# Altium PCB 400861.PcbDoc (part 6 of 7)
Units mm, origin at the board's own origin, x right, y up, seen from the top; angles counter-clockwise.
Board outline 145 x 63.5 mm, 8 copper layers (Top Side, Mid-Layer 1, Mid-Layer 2, Mid-Layer 3, Mid-Layer 4, Mid-Layer 5, Mid-Layer 6, Bottom Side), stack 1.529 mm thick; 287 components, 241 nets, 1164 pads, 3527 vias.
Unrouted connection lines stored in the file: 1.
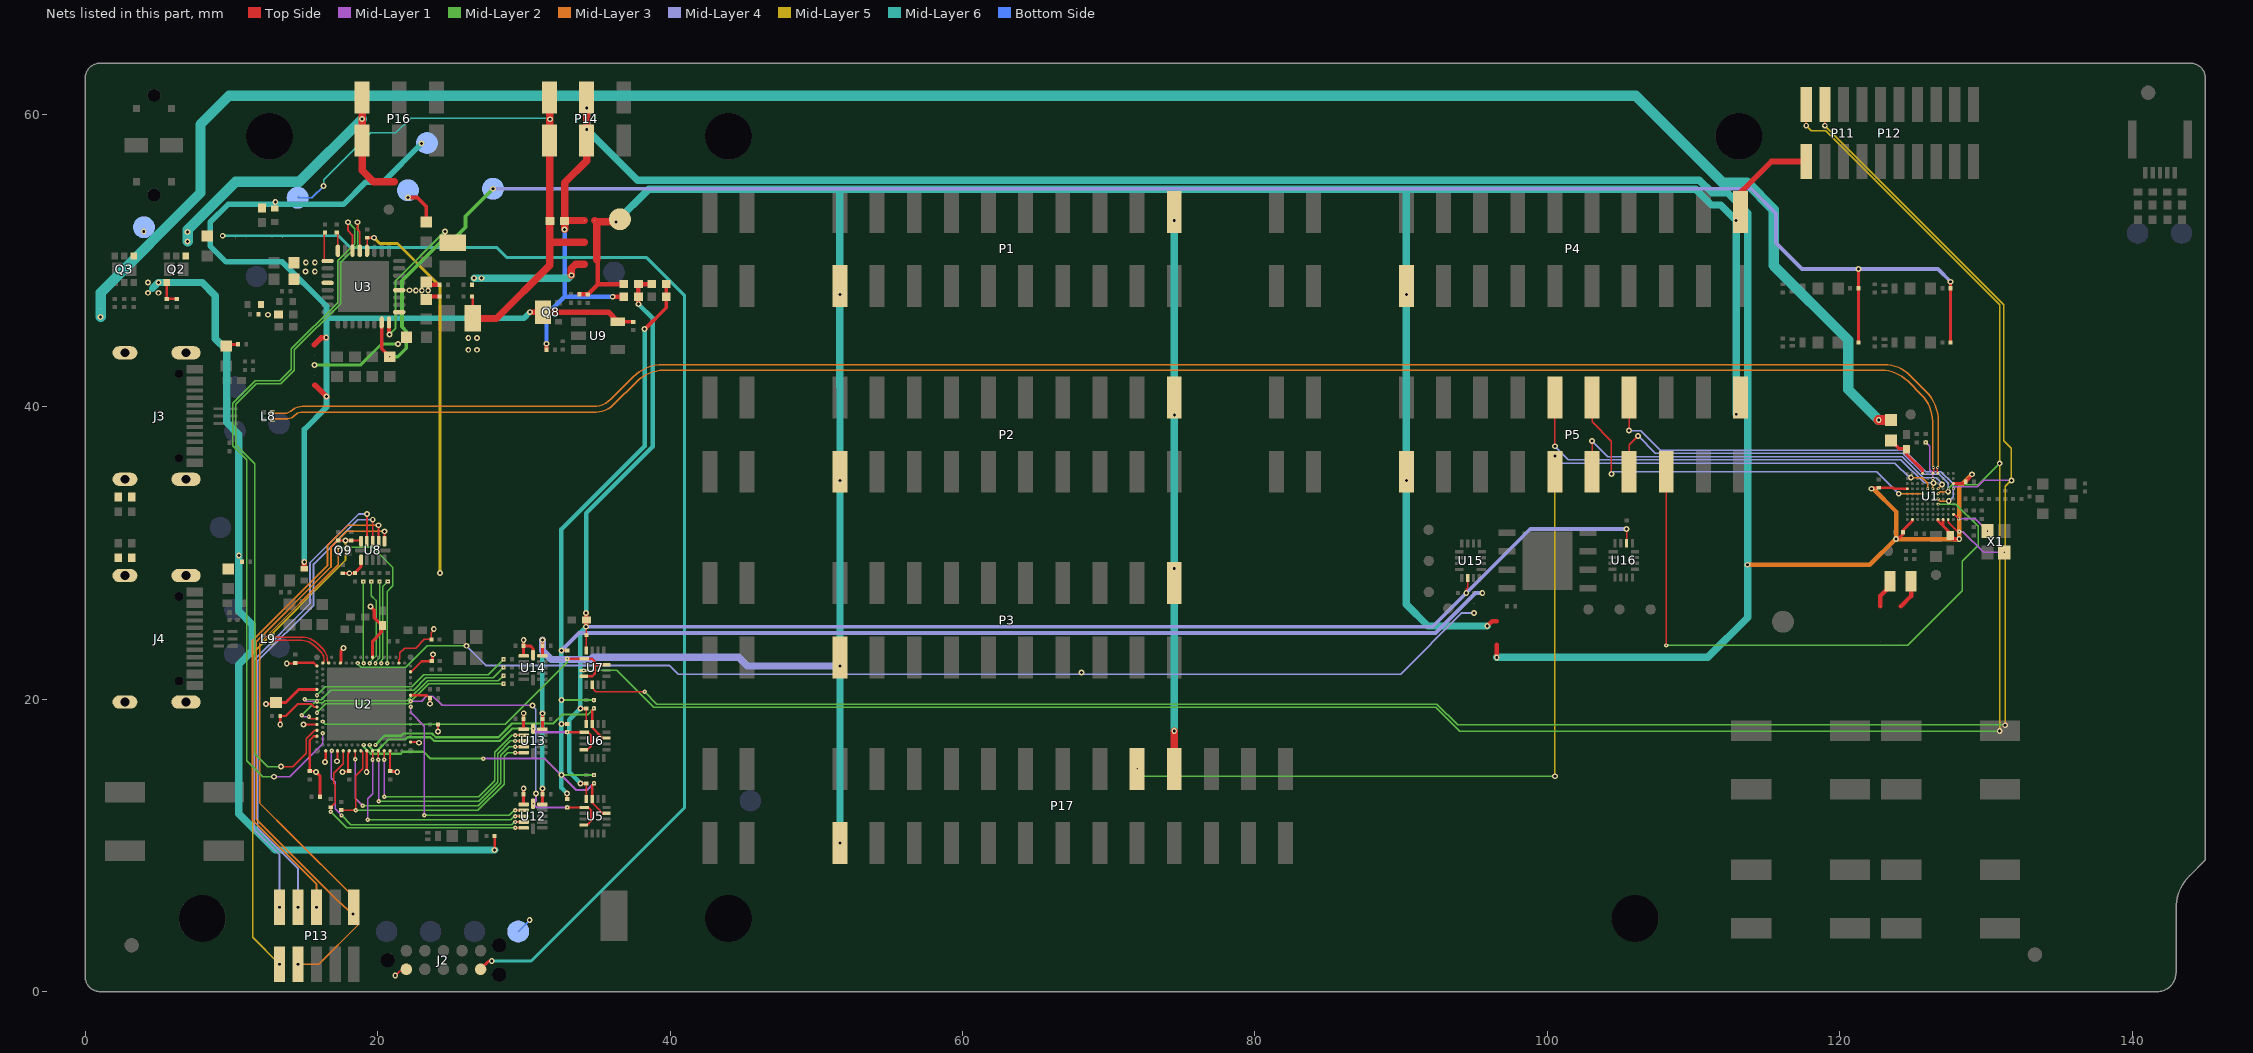
[diagram p11: the nets of this part, all layers, seen from the top]

## Via types
v1: diameter 0.4, hole 0.2, Top Side to Bottom Side, tented both sides, 2409 vias
v2: diameter 0.3, hole 0.1, Top Side to Mid-Layer 1, tented both sides, 307 vias
v3: diameter 0.3, hole 0.1, Mid-Layer 1 to Mid-Layer 2, tented both sides, 204 vias
v4: diameter 0.4, hole 0.2, Mid-Layer 3 to Mid-Layer 4, tented both sides, 199 vias
v5: diameter 0.3, hole 0.1, Mid-Layer 2 to Mid-Layer 3, tented both sides, 98 vias
v6: diameter 0.3, hole 0.1, Mid-Layer 4 to Mid-Layer 5, tented both sides, 82 vias
v7: diameter 0.3, hole 0.1, Mid-Layer 2 to Mid-Layer 3, 70 vias
v8: diameter 0.2, hole 0.1, Top Side to Mid-Layer 1, tented both sides, 64 vias
v9: diameter 0.2, hole 0.1, Mid-Layer 1 to Mid-Layer 2, tented both sides, 41 vias
v10: diameter 0.2, hole 0.1, Mid-Layer 2 to Mid-Layer 3, 17 vias
v11: diameter 0.2, hole 0.1, Mid-Layer 2 to Mid-Layer 3, tented both sides, 14 vias
v12: diameter 0.3, hole 0.1, Mid-Layer 5 to Mid-Layer 6, tented both sides, 12 vias
v13: diameter 0.2, hole 0.1, Mid-Layer 1 to Mid-Layer 2, 4 vias
v14: diameter 0.3, hole 0.1, Top Side to Mid-Layer 1, tented top, 3 vias
v15: diameter 0.2, hole 0.1, Top Side to Mid-Layer 1, tented top, 2 vias
v16: diameter 0.225, hole 0.1, Mid-Layer 1 to Mid-Layer 2, tented both sides, 1 vias

## Nets (pads, with @x,y where several pads share a name; then routed paths per layer and width w, separated by ;. In a path a pad name is that pad's centre, name@x,y a point inside that pad or via, vN(x,y) a via of type N, cw(c..) or ccw(c..) an arc to the next point about the centre after c; other vN are vias at no path point) (continued)
P3.06: P5.9 P17.18 U1.G6 | length 77.4
  Top Side w0.1: P17.18@71.94,15.24 v2(71.94,15.242)
  Mid-Layer 2 w0.1: v2(71.94,15.242) 72.445,14.737 100.511,14.737 v5(100.515,14.733)
  Mid-Layer 3 w0.1: v4(124.858,35.157) 124.874,35.141 125.658,35.141 126.02,34.779 v8(126.02,34.4)
  Mid-Layer 4 w0.1: v4(100.515,36.645) 101.002,36.158 123.774,36.158 124.776,35.157 v4(124.858,35.157)
  Mid-Layer 5 w0.1: v5(100.515,14.733) v4(100.515,36.645)
  other v2: 100.515,36.645
  other v3: 71.94,15.242 100.515,36.645
  other v4: 100.515,14.733
  other v5: 100.515,36.645
  other v6: 100.515,14.733 100.515,36.645
  other v9: 126.02,34.4
  other v11: 126.02,34.4
P3.07: P5.10 U1.G5 | length 30.1
  Top Side w0.1: v1(100.513,37.306) 100.515,37.308 P5.10@100.515,40.05
  Mid-Layer 3 w0.1: v11(126.37,34.4) 126.37,34.749 v4(126.419,34.797)
  Mid-Layer 4 w0.1: v1(100.513,37.306) 101.44,36.38 124.18,36.38 125.762,34.797 v4(126.419,34.797)
  other v8: 126.37,34.4
  other v9: 126.37,34.4
P3.08: P5.11 U1.G4 | length 28.3
  Top Side w0.1: P5.11@103.055,34.97 v1@103.055,37.659
  Mid-Layer 3 w0.1: v8(126.72,34.4) 126.988,34.668 v4(126.988,34.691)
  Mid-Layer 4 w0.1: v1(103.055,37.659) 104.134,36.58 124.283,36.58 125.706,35.157 126.597,35.157 126.988,34.765 v4(126.988,34.691)
  other v9: 126.72,34.4
  other v11: 126.72,34.4
P3.09: P5.12 U1.F7 | length 27.2
  Top Side w0.1: P5.12@103.055,40.05 103.055,38.97 104.379,37.647 v1(104.379,35.397)
  Mid-Layer 3 w0.1: v4(124.034,34.058) 124.042,34.05 v11(125.67,34.05)
  Mid-Layer 4 w0.1: v1(104.379,35.397) 104.532,35.55 122.542,35.55 v4(124.034,34.058)
  other v8: 125.67,34.05
  other v9: 125.67,34.05
P3.10: P5.13 U1.F4 | length 27.2
  Top Side w0.1: P5.13@105.595,34.97 105.595,37.401 v1(106.211,38.017)
  Mid-Layer 3 w0.1: v11(126.72,34.05) 126.867,34.197 v4(127.417,34.197)
  Mid-Layer 4 w0.1: v1(106.211,38.017) 107.394,36.834 124.323,36.834 125.784,35.373 126.818,35.373 127.417,34.773 v4(127.417,34.197)
  other v8: 126.72,34.05
  other v9: 126.72,34.05
P3.11: P5.14 U1.E4 | length 27.5
  Top Side w0.1: v1(105.595,38.374) P5.14@105.595,40.05
  Mid-Layer 3 w0.1: v9(126.72,33.7) 126.871,33.55 v4(127.455,33.55)
  Mid-Layer 4 w0.1: v1(105.595,38.374) 106.388,38.374 107.724,37.039 124.417,37.039 125.878,35.577 126.916,35.577 127.767,34.725 127.767,33.862 v4(127.455,33.55)
  other v8: 126.72,33.7
  other v11: 126.72,33.7
P3.12: P5.15 U1.D4 | length 41.3
  Top Side w0.1: v2(108.135,23.68) P5.15@108.135,34.97
  Mid-Layer 2 w0.1: v2(108.135,23.68) 124.634,23.68 128.39,27.436 128.39,29.447 129.475,30.533 129.475,31.817 127.942,33.35 v9(126.72,33.35)
  other v3: 108.135,23.68
  other v8: 126.72,33.35
P5V0: C38.2 C59.1 FB5.2 Q8.3 R16.2 SB28.1 SB29.1 TP4.1 U9.5 | length 70.3
  Top Side w0.254: U9.5@36.433,45.816 C59.1@37.477,45.816
  Top Side w0.381: FB5.2@14.982,28.924 v1(14.982,29.393) ; SB28.1@15.67,44.25 16.155,44.736 v1(16.483,44.736) ; 15.71,41.49 v1(16.5,40.7) ; v1(30.415,46.473) 35.776,46.473 U9.5@36.433,45.816
  Mid-Layer 6 w0.381: v1(14.982,29.393) 14.982,38.457 16.5,39.974 16.5,44.719 v1(16.483,44.736) 16.5,44.752 16.5,46.034 ; v1(23,58) 20.361,55.361 19.168,55.361 17.655,53.848 13.152,53.848 v1(13,54) 12.848,53.848 9.77,53.848 8.546,52.624 8.546,51 9.634,49.912 13.475,49.912 16.5,46.887 16.5,46.035 ; v1(30.415,46.473) 29.989,46.047 16.513,46.047 16.5,46.035
P5V0:LED: C52.2 R25.2 R26.2 R27.2 R28.2 TP1.1 U3.31 | length 130.7
  Top Side w0.203: R27.2@121.285,44.4 R25.2@121.285,48.1 121.285,49.367 cw(c121.366,49.367) v1@121.309,49.424 ; R28.2@127.585,44.4 R26.2@127.585,48.1 v1(127.585,48.555)
  Top Side w0.254: U3.31@20.275,45.775 20.275,43.977 v2(20.825,43.427)
  Mid-Layer 2 w0.254: v2(20.825,43.427) 21.374,43.427 21.961,44.013 21.961,45.178 21.658,45.481 21.658,48.62 24.557,51.519 25.25,51.519 26.014,52.283 26.014,53.04 v1(27.889,54.915)
  Mid-Layer 4 w0.254: v1(27.889,54.915) 113.941,54.915 115.632,53.224 115.632,51.214 117.422,49.424 v1(121.285,49.424) 126.716,49.424 v1(127.585,48.555)
  other v3: 20.825,43.427
QSPI_CTRL: SB5.1 U2.B14 | length 79.7
  Mid-Layer 2 w0.1: v3(18.65,22.478) 18.65,22.408 18.883,22.175 21.912,22.175 23.393,23.657 v5(26.07,23.657)
  Mid-Layer 4 w0.127: v5(26.07,23.657) 27.429,22.298 39.963,22.298 40.55,21.711 68.132,21.711 89.967,21.711 94.158,25.903 v4(94.981,25.903)
  other v1: 68.132,21.831
  other v2: 18.65,22.478 94.981,25.903
  other v3: 94.981,25.903
  other v4: 26.07,23.657
  other v5: 94.981,25.903
Shield: C67.1 C68.1 C73.1 C74.1 J3.SHLD J4.SHLD
SWD0_CLK: R12.1 U2.B18 | length 5.9
  Top Side w0.106: R12.1@19.567,28.049 v3(19.567,28.052)
  Mid-Layer 2 w0.106: v3(19.45,22.475) 19.45,22.518 19.89,22.958 19.89,26.762 19.567,27.084 v3(19.567,28.052)
  other v2: 19.45,22.475 19.567,28.052
SWD0_CLK_EXT: P13.6 U8.8 | length 33.8
  Top Side w0.125: U8.8@20.064,30.816 v1(20.064,31.901)
  Mid-Layer 3 w0.125: v1(15.827,5.775) 15.827,7.354 11.431,11.75 11.431,24.002 16.564,29.135 16.564,30.496 17.97,31.901 v1(20.064,31.901)
SWD0_IO: R6.1 U2.B16 | length 5.6
  Top Side w0.106: R6.1@19.007,28.048 v3(19.007,28.05)
  Mid-Layer 2 w0.106: v3@19.007,28.053 19.007,22.519 v3(19.05,22.475)
  other v2: 19.05,22.475 19.007,28.05
SWD0_IO_EXT: P13.10 U8.7 | length 36.1
  Top Side w0.125: v1(18.3,5.3) P13.10@18.367,6.595 ; U8.7@20.464,30.816 20.464,31.473 v1(20.477,31.486)
  Mid-Layer 3 w0.125: 11.696,11.804 11.696,23.942 16.801,29.048 16.801,30.395 17.893,31.486 v1(20.477,31.486) ; 11.696,11.804 17.269,6.232 ; 17.269,6.231 ccw(c17.357,6.32) 17.273,6.228 v1(18.3,5.3)
SWD0_RESET: R47.1 U2.B22 | length 5.8
  Top Side w0.106: R47.1@20.689,28.051 v2(20.689,28.053)
  Mid-Layer 2 w0.106: v3(20.25,22.475) 20.25,22.65 20.338,22.739 20.338,27.703 v2(20.689,28.053)
  other v2: 20.25,22.475
  other v3: 20.689,28.053
SWD0_RESET_EXT: P13.2 U8.10 | length 33.8
  Top Side w0.125: v1(13.287,5.775) P13.2@13.287,6.595 ; U8.10@19.264,30.816 v1(19.264,32.67)
  Mid-Layer 4 w0.125: v1(13.287,5.775) 13.287,9.353 11.553,11.086 11.553,22.711 15.374,26.531 15.374,29.338 18.706,32.67 v1(19.264,32.67)
SWD0_SEL: P13.3 Q9.1 U2.B24 | length 47.1
  Mid-Layer 2 w0.106: v3(17.31,30.401) 19.654,30.401 21.036,29.019 21.036,27.759 20.65,27.373 v3(20.65,22.475)
  Mid-Layer 3 w0.106: v1(14.557,1.875) 15.975,1.875 18.663,4.564 18.663,6.167 18.037,6.793 ; v3(17.31,30.401) 17.31,29.205 15.802,27.698 13.529,25.425 11.922,23.818 11.922,12.909 14.233,10.598 18.036,6.795
  other v2: 20.65,22.475 17.31,30.401
  other v5: 17.31,30.401
SWD0_SWO: R13.1 U2.B20 | length 5.7
  Top Side w0.106: v2(20.128,28.051) R13.1@20.128,28.053
  Mid-Layer 2 w0.106: v3(19.85,22.475) 19.85,22.552 20.128,22.83 v3@20.128,28.053 ; v2(20.128,28.051) v3@20.136,28.043
  other v2: 19.85,22.475
  other v3: 20.128,28.051
SWD0_SWO_EXT: P13.4 U8.9 | length 33.8
  Top Side w0.125: v1(14.557,5.775) P13.4@14.557,6.595 ; U8.9@19.664,30.816 v1(19.664,32.283)
  Mid-Layer 4 w0.125: v1(14.557,5.775) 14.557,8.411 11.8,11.168 11.8,22.623 15.615,26.437 15.615,29.245 18.652,32.283 v1(19.664,32.283)
SWD3_CLK: R49.1 U2.R1 | length 15.4
  Mid-Layer 1 w0.1: v3(15,20) 15.125,19.875 v2(15.85,19.875)
  Mid-Layer 2 w0.1: v3(15,20) 15.026,19.974 16.132,19.974 16.788,20.63 22.462,20.63 23.3,21.469 27.903,21.469 v3(28.608,22.174)
  other v2: 28.608,22.174
SWD3_CTRL: R40.2 U2.AB2 U7.1 U7.4 U7.11 | length 23.2
  Top Side w0.152: v3(32.956,22.767) 34.657,22.767 34.843,22.582 34.843,21.725 34.685,21.567 U7.4@34.095,21.567 ; 34.873,22.367 U7.11@35.645,22.367
  Mid-Layer 2 w0.1: v2(16.25,18.475) 16.425,18.3 28.738,18.3 32.956,22.519 v3(32.956,22.767)
  other v2: 32.956,22.767
  other v3: 16.25,18.475
SWD3_IO: R48.1 U2.N1 | length 13.8
  Mid-Layer 2 w0.1: v2(15.85,20.275) 16.419,20.844 22.335,20.844 23.166,21.675 27.551,21.675 v3(28.608,22.731)
  other v2: 28.608,22.731
  other v3: 15.85,20.275
SWD3_RESET: R50.1 U2.AA1 | length 16.1
  Top Side w0.1: v2(15.3,18.8) 15.425,18.675 U2.AA1@15.85,18.675
  Mid-Layer 1 w0.1: v3(14.8,18.9) 14.9,18.8 v2(15.3,18.8)
  Mid-Layer 2 w0.1: v3@14.819,18.881 v3(14.8,18.9) 15.658,19.759 16.238,19.759 16.365,19.886 22.026,19.886 23.41,21.269 28.26,21.269 v3(28.608,21.617)
  other v2: 28.608,21.617
SWD3_SWO: R57.1 U2.W1 | length 13.6
  Top Side w0.1: R57.1@28.608,21.06 v2(28.608,21.062)
  Mid-Layer 2 w0.1: v3(15.85,19.075) 16.456,19.681 22.107,19.681 23.488,21.062 v2(28.608,21.062)
  other v2: 15.85,19.075
  other v3: 28.608,21.062
SWDCLK: P11.4 P12.4 U1.G1 U7.6 | length 150
  Top Side w0.1: U7.6@34.67,20.992 34.67,20.772 34.93,20.512 v2(38.257,20.512) ; v1(118.977,59.228) P11.4@118.977,60.676
  Mid-Layer 1 w0.1: v15(127.77,34.4) 127.892,34.522 129.395,34.522 129.847,34.974 v1(131.736,34.974)
  Mid-Layer 2 w0.1: v2(38.257,20.512) 39.104,19.665 92.453,19.665 93.868,18.249 v5@131.315,18.249
  Mid-Layer 5 w0.1: v1(118.977,59.228) 131.232,46.973 131.232,37.687 131.735,37.184 v1(131.736,34.974) v1(131.736,34.974) 131.315,34.552 v5(131.315,18.224)
  other v3: 38.257,20.512
  other v4: 131.315,18.224
  other v6: 131.315,18.224
SWDIO: P11.2 P12.2 U1.G2 U7.3 | length 151.7
  Top Side w0.1: v1(117.707,59.228) P12.2@117.707,60.676
  Mid-Layer 2 w0.1: v3(34.095,21.967) 36.368,21.967 38.886,19.45 92.379,19.45 94.005,17.824 v5(130.938,17.824) ; v8(127.42,34.4) 127.696,34.675 129.474,34.675 v1(130.938,36.139)
  Mid-Layer 5 w0.1: v1(117.707,59.228) 118.06,58.875 119.029,58.875 130.938,46.967 v1(130.938,36.139) v5(130.938,17.824)
  other v2: 34.095,21.967
  other v4: 130.938,17.824
  other v6: 130.938,17.824
  other v13: 127.42,34.4
TRXTUNE: R2.2 U1.J5 | length 2.7
  Mid-Layer 1 w0.1: v2(125.874,37.566) 126.138,37.302 126.138,35.699 126.37,35.467 v8(126.37,35.1)
TWI0_SCL: U2.AF2 U3.14 | length 51.3
  Top Side w0.125: v1(17.975,52.625) 17.975,52.044 18.275,51.744 U3.14@18.275,50.675
  Mid-Layer 1 w0.1: v1(12.9,14.7) 14,14.7 16.25,16.95 v2(16.25,17.675)
  Mid-Layer 2 w0.1: v1(12.9,14.7) 12.128,14.7 11.04,15.788 11.04,36.382 10.085,37.336 10.085,40.248 11.61,41.773 13.3,41.773 14.102,42.575 14.102,43.977 17.255,47.13 17.255,49.979 18.423,51.147 18.423,52.177 v1(17.975,52.625)
TWI0_SDA: U2.AE1 U3.13 | length 49.6
  Top Side w0.1: v1(13.4,15.4) 14.2,15.4 15.111,16.311 15.111,17.289 15.697,17.875 U2.AE1@15.85,17.875
  Top Side w0.125: v1(18.625,52.625) 18.625,52.139 18.775,51.989 U3.13@18.775,50.675
  Mid-Layer 2 w0.1: v1(13.4,15.4) 12.486,15.4 11.6,16.287 11.6,36.107 10.29,37.417 10.29,40.169 11.693,41.572 13.386,41.572 14.304,42.49 14.304,43.892 17.459,47.047 17.459,49.891 18.625,51.057 v1(18.625,52.625)
UART0_CTRL: R36.2 U2.R31 U5.1 U5.4 U12.12 | length 21.1
  Top Side w0.152: v2(32.956,12.606) 34.393,12.606 34.612,12.386 34.612,11.688 34.331,11.406 U5.4@34.095,11.406
  Mid-Layer 1 w0.1: v2(22.25,19.875) 22.998,19.875 23.332,20.21 23.771,20.21 24.405,19.576 v1(30.582,19.576)
  Mid-Layer 1 w0.152: v1(30.827,13.552) 30.827,13.054 v2(30.629,12.856) 30.879,12.606 v2(32.956,12.606)
  Mid-Layer 4 w0.1: v1(30.582,19.576) 30.827,19.331 v1(30.827,13.552)
UART0_CTS_DBGR: R9.1 U2.AL9 U12.5 | length 18.3
  Top Side w0.1: v2(16.8,12.3) R9.1@16.8,12.615 17.113,12.928 17.113,14.13 17,14.243 17,14.938 17.65,15.588 U2.AL9@17.65,16.475 ; v2(29.397,11.206) U12.5@29.989,11.206
  Mid-Layer 2 w0.1: v2(16.8,12.3) 17.895,11.206 v2(29.397,11.206)
  other v3: 29.397,11.206 16.8,12.3
UART0_HWFC: R19.2 U2.AK16 U5.11 U5.15 | length 20
  Top Side w0.152: v2(34.797,14.247) 34.67,14.12 U5.15@34.67,13.181 34.67,12.927 35.391,12.206 U5.11@35.645,12.206
  Mid-Layer 1 w0.152: v3(27.222,15.94) 31.432,15.94 33.579,13.793 34.342,13.793 v2(34.797,14.247)
  Mid-Layer 2 w0.152: v3(19.05,16.875) 19.05,16.741 19.522,16.269 21.584,16.269 21.718,16.404 23.157,16.404 23.621,15.94 v3(27.222,15.94)
  other v2: 19.05,16.875
UART0_RTS_DBGR: U2.AL5 U12.4 | length 17.5
  Top Side w0.1: v2(29.397,11.606) U12.4@29.989,11.606
  Mid-Layer 1 w0.1: v2(16.85,16.475) 16.809,16.434 16.809,14.584 17.085,14.308 17.085,12.497 v3(17.53,12.053)
  Mid-Layer 2 w0.1: v3(17.53,12.053) 18.162,11.421 29.181,11.421 29.366,11.606 v2(29.397,11.606)
  other v3: 29.397,11.606
UART0_RxD_DBGR: U2.AL19 U12.3 | length 15.6
  Top Side w0.1: v2(19.65,15.851) U2.AL19@19.65,16.475 ; v3(29.397,12.006) U12.3@29.989,12.006
  Mid-Layer 1 w0.1: v3(19.311,11.756) 19.311,13.211 19.65,13.55 19.65,15.482 v2(19.65,15.851)
  Mid-Layer 2 w0.1: v3(19.311,11.756) 29.089,11.756 29.338,12.006 v3(29.397,12.006)
  other v2: 29.397,12.006
UART0_TxD_DBGR: U2.U31 U12.2 | length 14.7
  Top Side w0.1: v3(29.397,12.406) U12.2@29.989,12.406
  Mid-Layer 1 w0.1: v2(22.25,19.475) 22.25,19.101 23.189,18.161 v3(23.189,12.067)
  Mid-Layer 2 w0.1: v3(23.189,12.067) 28.998,12.067 29.337,12.406 v3(29.397,12.406)
  other v2: 29.397,12.406
UART1_CTRL: R38.2 U2.AK18 U6.1 U6.4 U13.12 | length 17.7
  Top Side w0.152: v2(32.956,17.747) U6.1@34.145,17.746 34.397,17.746 34.599,17.545 34.599,16.805 34.34,16.546 U6.4@34.095,16.546
  Mid-Layer 1 w0.152: v2(30.629,17.996) 30.879,17.747 v2(32.956,17.747)
  Mid-Layer 2 w0.152: v2(19.45,16.875) 19.45,16.739 19.655,16.534 20.018,16.534 20.725,17.24 21.871,17.24 22.04,17.409 23.611,17.409 23.879,17.142 28.353,17.142 29.208,17.996 v2(30.629,17.996)
  other v3: 19.45,16.875 30.629,17.996
UART1_CTS_DBGR: R10.1 U2.AL15 U13.5 | length 19.6
  Top Side w0.1: R10.1@17.5,12.415 17.5,12.4 v2(18.503,12.4) 18.503,14.776 18.965,15.238 18.965,16.36 U2.AL15@18.85,16.475 ; v3(29.397,16.346) U13.5@29.989,16.346
  Mid-Layer 2 w0.1: v2(18.503,12.4) 26.859,12.4 28.656,14.198 28.656,16.105 28.898,16.346 v3(29.397,16.346)
  other v2: 29.397,16.346
  other v3: 18.503,12.4
UART1_HWFC: R37.2 U2.AK20 U6.11 U6.15 | length 18.8
  Top Side w0.152: v3(34.794,19.375) 34.67,19.25 U6.15@34.67,18.322 34.67,18.062 35.385,17.346 U6.11@35.645,17.346
  Mid-Layer 2 w0.152: v2(19.85,16.875) 20.473,17.498 21.596,17.498 21.761,17.663 23.718,17.663 23.977,17.404 28.259,17.404 29.193,18.338 32.015,18.338 32.627,18.95 34.37,18.95 v3(34.794,19.375)
  other v2: 34.794,19.375
  other v3: 19.85,16.875
UART1_RTS_DBGR: U2.AL13 U13.4 | length 17.8
  Top Side w0.1: U2.AL13@18.45,16.475 18.474,16.451 18.474,16.363 18.475,16.362 v2(18.475,15.9) ; v3(29.397,16.746) U13.4@29.989,16.746
  Mid-Layer 1 w0.1: v2(18.475,15.9) 18.475,13.213 v3(18.975,12.713)
  Mid-Layer 2 w0.1: v3(18.975,12.713) 26.878,12.713 28.433,14.268 28.433,16.188 28.992,16.746 v3(29.397,16.746)
  other v2: 29.397,16.746
UART1_RxD_DBGR: U2.AL21 U13.3 | length 16.2
  Top Side w0.1: v2(20.05,15.851) U2.AL21@20.05,16.475 ; v3(29.397,17.146) U13.3@29.989,17.146
  Mid-Layer 1 w0.1: v2(20.05,15.851) 20.069,15.832 v3(20.069,13.023)
  Mid-Layer 2 w0.1: v3(20.069,13.023) 26.903,13.023 28.219,14.338 28.219,16.284 29.081,17.146 v3(29.397,17.146)
  other v2: 29.397,17.146
UART1_TxD_DBGR: U2.AL23 U13.2 | length 15.6
  Top Side w0.1: v3(29.397,17.546) U13.2@29.989,17.546
  Top Side w0.125: v2(20.45,15.85) U2.AL23@20.45,16.475
  Mid-Layer 1 w0.1: v3(20.45,13.338) v2(20.45,15.85)
  Mid-Layer 2 w0.1: v3(20.45,13.338) 26.918,13.338 27.999,14.419 27.999,16.364 29.182,17.546 v3(29.397,17.546)
  other v2: 29.397,17.546
USB_DBGR_N: L9.4 U2.B4 | length 4.8
  Top Side w0.099: L9.4@12.8,24.384 ccw(c13.131,24.715) 13.131,24.247 14.792,24.247 cw(c14.792,22.686) 15.896,23.79 16.266,23.42 cw(c15.549,22.703) 16.563,22.703 16.563,22.685 ccw(c16.86,22.685) U2.B4@16.65,22.475
USB_DBGR_P: L9.3 U2.B2 | length 4.5
  Top Side w0.099: L9.3@12.8,23.884 cw(c13.131,23.554) 13.131,24.021 14.792,24.021 cw(c14.792,22.686) 15.736,23.63 16.106,23.26 cw(c15.549,22.703) 16.337,22.703 16.337,22.685 cw(c16.04,22.685) U2.B2@16.25,22.475
USB_nRF54_D+: L8.3 U1.K5 | length 120.1
  Top Side w0.099: U1.K5@126.37,35.45 ccw(c126.221,35.6) 126.432,35.6 126.432,35.754 ccw(c126.295,35.754) v11(126.392,35.851)
  Mid-Layer 3 w0.09: v5(12.8,39.12) cw(c12.932,38.989) 12.932,39.175 13.721,39.175 ccw(c13.721,40.034) 14.328,39.427 cw(c14.84,38.915) 14.84,39.639 15.447,39.639 34.934,39.639 ccw(c34.934,41.304) 36.111,40.126 37.741,41.756 cw(c39.537,39.96) 39.537,42.5 122.867,42.5 cw(c122.867,40) 124.634,41.768 125.605,40.797 cw(c123.809,39.001) 126.349,39.001 126.349,35.956 ccw(c126.496,35.956) v11(126.392,35.851)
  other v2: 12.8,39.12
  other v3: 12.8,39.12
  other v8: 126.392,35.851
  other v9: 126.392,35.851
USB_nRF54_D-: L8.4 U1.K4 | length 120.7
  Top Side w0.099: v11(126.699,35.851) ccw(c126.795,35.754) 126.658,35.754 126.658,35.6 ccw(c126.87,35.6) U1.K4@126.72,35.45
  Mid-Layer 3 w0.09: v2(12.8,39.619) ccw(c12.932,39.751) 12.932,39.565 13.721,39.565 ccw(c13.721,40.034) 14.053,39.702 cw(c14.841,38.914) 14.841,40.029 15.608,40.029 34.771,40.029 ccw(c34.771,41.687) 35.943,40.514 37.463,42.034 cw(c39.537,39.96) 39.537,42.893 123.029,42.893 cw(c123.029,40.393) 124.797,42.161 125.883,41.075 cw(c123.809,39.001) 126.742,39.001 126.742,35.956 cw(c126.594,35.956) v11(126.699,35.851)
  other v3: 12.8,39.619
  other v5: 12.8,39.619
  other v8: 126.699,35.851
  other v9: 126.699,35.851
VBUS: C34.2 C35.2 C55.2 J2.5 P16.1 Q2.4 Q3.4 R14.1 SB17.1 SB31.2 TP14.1 | length 110.4
  Top Side w0.2: J2.5@27.04,1.53 27.466,1.957 ; 27.553,2.043 27.466,1.957 ; v1(27.8,2.1) 27.61,2.1 27.466,1.957
  Top Side w0.5: P16.1@18.935,61.161 cw(c18.935,61.096) 19,61.096 18.935,61.031 P16.1@18.935,58.231 18.935,56.161 19.701,55.395 SB31.2@21.151,55.395
  Mid-Layer 6 w0.2: v1(9.4,51.7) 17.33,51.7 18.13,50.9 28.152,50.9 28.851,50.2 38.4,50.2 41,47.6 41,12.6 30.5,2.1 v1(27.8,2.1)
  Mid-Layer 6 w0.7: v1@7.009,51.305 7.009,51.947 7.009,52.119 10.285,55.394 14.643,55.394 v1(18.931,59.682)
  other v1: 12.5,46.3 7.002,51.298 7.002,51.947 4,52
VBUS:DBGR: C69.2 FB4.2 Q2.1 R5.2 R20.1 R21.1 | length 63
  Top Side w0.15: Q2.1@5.57,48.506 R20.1@5.57,47.391 R21.1@6.242,47.391 ; v1(28.003,9.685) R5.2@28.003,10.615
  Mid-Layer 6 w0.5: 4.6,48.1 v1(5,48.5) 8.004,48.5 8.9,47.604 8.9,44.654 9.672,43.882 9.672,38.923 10.502,38.093 v1(10.502,29.827) 10.502,26.037 11.432,25.106 11.432,23.314 10.5,22.381 10.5,12.175 12.989,9.685 v1(28.003,9.685)
  other v1: 4.3,47.8 5,47.8 4.3,48.5
VBUS:nRF: C63.2 FB3.2 R1.2 SB6.2 | length 146.7
  Top Side w0.106: FB3.2@9.635,44.147 FB3.2@9.763,44.275
  Top Side w0.2: FB3.2@9.763,44.275 C63.2@10.44,44.275
  Top Side w0.7: v1(122.666,39.098) R1.2@123.506,39.098
  Mid-Layer 6 w0.7: v1(1.052,46.152) 1.052,47.805 7.876,54.629 7.876,59.313 9.833,61.27 106.042,61.27 111.962,55.35 113.631,55.35 115.492,53.489 115.492,49.662 120.58,44.574 120.58,41.184 v1(122.666,39.098)
VBUS_5V0: C11.2 R1.1 U1.K7 | length 3.4
  Top Side w0.203: C11.2@124.568,37.101 124.568,36.765 125.67,35.663 U1.K7@125.67,35.45
  Top Side w0.254: R1.1@123.506,37.698 124.064,37.141 C11.2@124.528,37.141
VDD:DBGR: C15.1 C16.1 C17.1 C18.1 C21.1 C22.1 C23.1 C24.1 C26.1 C54.1 C77.1 C79.1 C82.1 C85.1 C88.2 J2.1 R7.2 R35.2 R39.2 TP7.1 U2.A19 U2.AC1 U2.AG1 U2.AJ31 U2.AL3 U2.AL7 U2.AL11 U2.AL17 U2.AL25 U2.B8 U2.B28 U2.C1 U2.E31 U2.L1 U2.N31 U2.U1 U3.12 U8.1 U12.1 U13.1 U14.1 U14.12 | length 71.9
  Top Side w0.1: U3.12@19.275,50.675 C54.1@19.275,51.565 ; v1(21.2,1.1) 21.511,1.411 21.841,1.411 J2.1@21.96,1.53 ; U2.B28@21.45,22.475 21.45,22.704 21.513,22.767 21.513,23.177 21.836,23.5 22.6,23.5 23.19,24.091 C24.1@23.668,24.091 23.668,24.548 23.839,24.719 v1(23.839,24.806)
  Top Side w0.15: v1(13.339,18.275) C15.1@13.339,18.854 13.714,18.854 14.536,19.675 15.463,19.675 15.663,19.475 U2.U1@15.85,19.475 ; v1(14.925,18.275) U2.AC1@15.85,18.275 ; C16.1@15.35,15.085 15.35,17.2 15.625,17.475 U2.AG1@15.85,17.475 ; C16.1@15.426,15.085 15.724,15.085 v1(15.774,15.035) ; v1(16.409,15.7) 16.45,15.7 U2.AL3@16.45,16.475 ; v1(17.209,15.763) ccw(c17.1,15.866) 17.25,15.866 U2.AL7@17.25,16.475 ; v1(17.599,15.035) 17.624,15.06 C17.1@18.022,15.06 ; U2.AL11@18.05,16.475 18.026,16.38 cw(c17.65,16.475) 17.984,16.28 ccw(c18.113,16.203) 17.963,16.204 17.963,15.286 ccw(c18.113,15.286) 18.007,15.18 18.042,15.145 C17.1@18.074,15.113 ; v1(19.25,15.025) U2.AL17@19.25,16.475 ; C21.1@20.85,15.035 C21.1@20.85,15.085 U2.AL25@20.85,16.475 ; 21.085,15.085 21.1,15.085 ; U2.AJ31@22.25,17.075 22.588,17.075 cw(c22.588,16.925) 22.621,17.072 v1(22.825,17.025) ; U2.N31@22.25,20.275 23.364,20.275 C22.1@23.573,20.067 23.574,20.066 23.574,19.699 v1(23.57,19.695) ; U2.E31@22.25,21.875 22.292,21.875 23.017,22.6 23.69,22.6 C23.1@23.7,22.61 ; v1(24.135,17.796) R7.2@24.135,18.275
  Top Side w0.152: v1(13.783,22.443) 14.302,22.443 C77.1@14.35,22.49 15.635,22.49 U2.C1@15.85,22.275
  Top Side w0.187: U2.B8@17.45,22.475 17.493,22.518 17.493,23.347 v1(17.653,23.508) ; v1@17.692,23.47 v1@17.73,23.508
  Top Side w0.2: v1(12.372,19.675) 12.75,19.675 C26.1@13.05,19.768 13.689,19.768 14.597,20.675 U2.L1@15.85,20.675 ; v1(15.774,15.035) 16.045,14.765 R35.2@16.045,13.341
  Top Side w0.203: R39.2@17.601,28.619 v1(18.061,28.619) C88.2@18.452,28.62 ; C88.2@18.452,28.62 18.452,28.655 18.864,29.067 U8.1@18.864,29.536 ; C54.1@19.275,51.565 v1(19.754,51.565) ; C21.1@20.85,15.085 20.875,15.06 21.313,15.06 v1(21.338,15.035) ; C23.1@23.7,22.61 23.704,22.61 23.738,22.644 23.738,23.038 v1(23.775,23.075) ; v1(29.987,13.903) C79.1@29.987,13.515 U12.1@29.989,12.806 U12.1@29.989,12.806 ; U13.1@29.989,17.946 C82.1@29.988,18.654 v1(29.988,19.042) ; U14.1@29.989,22.967 C85.1@29.989,23.655 ; v1(29.989,24.043) C85.1@29.989,23.655 ; U14.12@30.629,23.017 30.629,23.465 30.438,23.655 C85.1@29.989,23.655
  Top Side w0.225: v1(19.5,26.35) 19.775,26.075 19.775,25.575 C18.1@20.325,25.025 ; U2.A19@19.65,22.875 19.65,23.97 20.25,24.57 C18.1@20.25,25.025
  Mid-Layer 5 w0.203: v1(19.754,51.565) 20.147,51.173 21.348,51.173 24.271,48.25 24.271,28.645 v1(24.253,28.627)
  Mid-Layer 6 w0.305: v1(29.987,13.903) v1(29.987,13.903)
  Bottom Side w0.1: TP7.1@29.616,4.115 v1(30.398,4.897)
VDD:IO: C80.1 C83.1 C86.1 P1.1 P1.20 P2.1 P2.20 P3.1 P3.20 P4.1 P4.20 P5.1 P5.20 P11.1 P12.1 P17.1 P17.20 R42.1 R52.2 R53.2 SB19.1 SB20.1 SB21.1 SB23.1 TP2.1 U12.11 U13.11 U14.11 | length 263
  Top Side w0.203: U12.11@31.269,12.806 C80.1@31.269,13.511 v1(31.269,13.899) ; U13.11@31.269,17.946 C83.1@31.269,18.651 v1(31.269,19.039) ; U14.11@31.269,22.967 C86.1@31.269,23.655 v1(31.269,24.043)
  Top Side w0.305: R52.2@33.799,47.693 34.352,47.693 R53.2@34.359,47.687 35.066,48.393 ; 34.975,50.05 35.066,49.959 35.066,48.393 ; R42.1@36.835,48.393 35.066,48.393 ; v1(95.889,25.009) 96.218,25.338 SB23.1@96.541,25.338
  Top Side w0.4: P4.20@113.215,52.75 P4.20@113.215,53.34 113.215,54.665 115.326,56.776 P11.1@117.707,56.776
  Top Side w0.5: SB19.1@34.85,52.75 34.95,52.65 ; 34.975,50.05 34.975,52.625 34.95,52.65 ; v1(36.3,52.65) 34.95,52.65 ; v1(51.621,10.161) P17.1@51.621,10.186 ; P17.20@74.353,15.24 74.48,15.367 v1(74.48,17.83)
  Mid-Layer 4 w0.5: v1(31.269,24.043) 31.269,23.318 31.868,22.719 34.585,22.719 34.734,22.869 44.688,22.869 45.287,22.27 v1(51.62,22.27)
  Mid-Layer 6 w0.305: v1(31.269,13.899) v1(31.269,19.039) v1(31.269,24.043)
  Mid-Layer 6 w0.5: v1(36.3,52.65) 38.531,54.881 51.489,54.881 ; v1@51.62,10.16 v1(51.62,22.27) v1(51.62,34.97) 51.596,47.669 51.596,54.774 51.489,54.881 ; v1@74.48,17.804 v1(74.48,28.934) 74.48,39.435 v1(74.5,39.455) 74.48,39.475 v1(74.48,52.75) 74.48,54.838 74.523,54.881 ; v1(95.889,25.009) 91.842,25.009 90.355,26.496 v1(90.355,34.97) v1(90.355,47.67) 90.355,54.764 90.472,54.881 ; v1(112.921,39.494) 112.915,39.501 v1(112.915,52.75) 111.864,53.8 111.229,53.8 110.148,54.881 90.472,54.881 ; 51.489,54.881 74.523,54.881 ; 74.523,54.881 90.472,54.881
  other v1: 51.62,47.67
VDD:nRF: C1.1 C2.1 C4.2 C5.1 P14.2 R15.1 R43.1 R55.1 SB19.2 SB24.1 U1.A3 U1.A4 U1.A9 U1.G10 U1.H1 | length 185.8
  Top Side w0.2: v1(122.182,34.398) 122.25,34.466 C2.1@122.674,34.466 123.639,34.466 123.705,34.4 U1.G10@124.62,34.4 ; v1(123.849,30.951) 123.99,30.951 124.331,31.292 C5.1@124.331,31.414 ; C5.1@124.357,31.414 124.357,31.597 124.97,32.211 U1.A9@124.97,32.3 ; U1.H1@127.77,34.75 128.491,34.75 C1.1@128.618,34.877 129.048,35.307 v1(129.048,35.385)
  Top Side w0.203: U1.A4@126.72,32.3 126.72,32.194 127.07,31.844 ; U1.A3@127.07,32.3 127.07,31.844 ; C4.2@127.552,31.202 127.552,31.362 127.07,31.844
  Top Side w0.305: R55.1@31.547,43.916 v1(31.547,44.313) ; v1(36.075,47.531) R43.1@36.835,47.531 ; v1(96.541,22.866) SB24.1@96.541,23.738 ; C4.2@127.552,31.202 127.803,30.951 v1(128.174,30.951)
  Top Side w0.5: v1(32.787,52.129) R15.1@32.787,52.709 ; SB19.2@34.15,52.75 32.8,52.75 32.8,55.338 34.3,56.838 34.3,57.386 P14.2@34.293,58.231 ; P14.2@34.293,61.161 34.299,60.432 34.3,60.316 v1(34.3,58.97)
  Mid-Layer 3 w0.305: v1(113.7,29.199) 122.06,29.199 123.812,30.951 v1(123.849,30.951) ; v1(122.182,34.398) 122.29,34.398 123.849,32.84 v1(123.849,30.951) ; v1(129.048,35.385) 128.174,34.511 v1(128.174,30.951) v1(123.849,30.951)
  Mid-Layer 6 w0.5: v1(34.299,60.426) v1(34.3,58.97) 37.766,55.504 110.4,55.504 111.27,54.633 112.317,54.633 113.081,53.869 ; v1(96.541,22.866) 110.98,22.866 113.7,25.587 v1(113.7,29.199) 113.7,53.25 113.088,53.862
  Bottom Side w0.305: v1(31.547,44.313) 31.547,46.294 32.784,47.531 ; v1(32.787,52.129) 32.787,47.533 32.784,47.531 ; v1(36.075,47.531) 32.784,47.531
VDD:nRF_PMIC: C46.2 C47.2 L7.1 P14.1 R15.2 SB20.2 SB27.1 SB30.1 TP5.1 U3.1 | length 48.4
  Top Side w0.15: C47.2@26.448,47.547 cw(c26.448,47.498) 26.497,47.498 L7.1@26.497,46.047
  Top Side w0.5: L7.1@26.497,46.047 28.134,46.047 31.76,49.674 31.76,52.684 R15.2@31.787,52.709 31.76,52.734 31.76,57.386 P14.1@31.753,58.231 31.76,59.076 31.76,60.316 P14.1@31.753,61.161 ; 31.768,51.25 SB20.2@34.15,51.25
  Mid-Layer 2 w0.2: v1(15.67,42.85) 18.418,42.85 18.812,42.85 20.253,44.291 v1(21.402,44.291)
  Mid-Layer 6 w0.1: v1(16.3,55.1) 16.3,55.459 cw(c16.4,55.459) 16.329,55.529 19.537,58.737 21.252,58.737 22.249,59.733 31.567,59.733 31.573,59.727 31.718,59.727 v1(31.775,59.669)
  Bottom Side w0.1: TP5.1@14.633,54.41 TP5.1@14.529,54.306 15.506,54.306 v1(16.3,55.1)
  other v1: 26.2,43.9 26.8,43.9 26.2,44.7 26.8,44.7
VDD:SW: C61.1 C62.1 C78.1 C81.1 C84.1 C87.2 R42.2 R43.2 R44.2 U5.16 U6.16 U7.16 U15.14 U16.14 | length 118.7
  Top Side w0.1: v1(34.256,24.958) 34.27,24.944 U7.16@34.27,23.342 ; U5.16@34.27,13.181 C78.1@34.27,14.247 ; U6.16@34.27,18.322 C81.1@34.27,19.375 ; v2(94.453,27.266) 94.453,27.518 94.55,27.616 U15.14@94.55,28.308 ; U16.14@105.423,30.67 v6(105.423,31.641) C61.1@105.423,31.692
  Top Side w0.203: v1(33.866,19.364) 33.876,19.375 C81.1@34.27,19.375 ; v1(33.874,14.247) C78.1@34.27,14.247
  Top Side w0.305: v1(34.256,24.958) v1(34.256,25.903) ; v1(37.835,47.02) R43.2@37.835,47.531 R42.2@37.835,48.393 R44.2@38.742,48.393
  Mid-Layer 4 w0.254: v1(34.256,24.958) 92.144,24.958 v2(94.453,27.266) 98.828,31.641 v6(105.423,31.641)
  Mid-Layer 6 w0.305: v1(33.874,14.247) 33.095,15.027 33.095,18.593 v1(33.866,19.364) 33.866,24.568 v1(34.256,24.958) ; v1(34.256,25.903) 34.256,32.736 38.804,37.284 38.804,46.051 v1(37.835,47.02)
  other v2: 105.423,31.641
  other v3: 94.453,27.266 105.423,31.641
  other v4: 94.453,27.266 105.423,31.641
  other v5: 94.453,27.266 105.423,31.641
VDD:SW_PU: R19.1 R36.1 R37.1 R38.1 R40.1 R44.1 R51.1 R56.2 | length 108.2
  Top Side w0.152: v1(32.57,18.315) 32.572,18.317 R38.1@32.956,18.317 ; v1(32.572,23.335) 32.575,23.337 R40.1@32.956,23.337 ; R36.1@32.956,13.176 v1(32.956,13.555)
  Top Side w0.254: v2(34.796,14.816) v2(34.796,14.816) ; v1(38.262,45.317) 38.276,45.317 39.742,46.782 R51.1@39.742,47.531 R44.1@39.742,48.393
  Mid-Layer 2 w0.152: v5(32.57,14.823) 32.577,14.816 v2(34.796,14.816) ; v5@32.57,19.944 v2(34.793,19.944)
  Mid-Layer 4 w0.254: v1(32.572,23.335) 33.765,24.527 92.351,24.527 95.087,27.262 v4(95.551,27.262)
  Mid-Layer 6 w0.152: v5(32.57,19.944) v5(32.57,19.944)
  Mid-Layer 6 w0.305: v1(32.956,13.555) 32.57,13.94 v5(32.57,14.823) v1(32.57,18.315) v5(32.57,19.944) 32.57,23.335 32.57,31.627 38.262,37.319 v1(38.262,45.317)
  other v2: 95.551,27.262
  other v3: 34.796,14.816 34.793,19.944 95.551,27.262
  other v4: 32.57,14.823 32.57,19.944
  other v5: 95.551,27.262
  other v6: 32.57,14.823 32.57,19.944
  other v12: 32.57,14.823 32.57,19.944
VDD:SWD0: C89.1 P13.1 R41.2 U8.11 | length 34
  Top Side w0.125: R41.2@17.305,30.866 v1(17.798,30.866) 18.813,30.866 U8.11@18.864,30.816
  Mid-Layer 5 w0.125: v1(13.287,1.875) 11.453,3.709 11.453,23.16 17.798,29.505 v1(17.798,30.866)
VOUT2: C48.2 C49.2 L6.1 SB21.2 TP6.1 U3.32 | length 20.5
  Top Side w0.25: v1(22.074,54.318) 22.716,54.318 23.327,53.707 C48.2@23.327,52.635 C48.2@23.327,52.91
  Top Side w0.254: U3.32@20.775,45.775 20.775,44.975 v1(20.8,44.95)
  Top Side w0.5: v1(33.25,49) 33.25,49.457 33.543,49.75 SB21.2@34.15,49.75
  Mid-Layer 2 w0.15: v1(20.8,44.95) 21.228,45.378 21.228,48.628 v1(24.6,52)
  Mid-Layer 6 w0.5: v1(26.6,48.8) v1(27.1,48.8) 33.05,48.8 v1(33.25,49)
VSET1: R17.1 U3.17 | length 2
  Top Side w0.125: 16.342,51.775 16.342,50.056 16.423,49.975 U3.17@16.575,49.975
VSET2: R18.1 U3.16 | length 1.3
  Top Side w0.125: R18.1@17.2,51.915 17.275,51.84 U3.16@17.275,50.675
VSYS: C40.2 C41.2 C42.2 C43.2 C44.2 C45.2 SB18.2 U3.4 U3.20 | length 1.1
  Top Side w0.3: C40.2@23.527,47.547 24.092,47.547 ; C41.2@23.527,48.347 24.092,48.347
  other v1: 23.019,47.962 23.455,47.955 22.173,47.976 22.609,47.965 15.075,49.25 15.7,49.25 15.085,49.875 15.7,49.875
XC1: U1.A2 X1.1 | length 4.9
  Top Side w0.1: U1.A2@127.42,32.3 127.42,32.116 128.067,31.469 v2(128.174,31.469)
  Mid-Layer 1 w0.1: v2(128.174,31.469) 128.408,31.469 129.831,30.046 v2(131.256,30.046)
XC2: U1.B1 X1.3 | length 2.8
  Top Side w0.1: U1.B1@127.77,32.65 127.835,32.65 v8(128.152,32.333)
  Mid-Layer 1 w0.1: v8(128.152,32.333) 129.268,32.333 v2(130.106,31.496)
XL1: SB1.2 X2.2 | length 2
  Top Side w0.3: SB1.2@124.172,26.35 124.878,27.056 124.878,27.736 X2.2@124.878,28.074
XL2: SB2.2 X2.1 | length 2.3
  Top Side w0.3: SB2.2@122.772,26.35 122.772,27.067 123.428,27.723 X2.1@123.428,28.074 X2.1@123.428,27.722
pads on no net: Fid1.0 Fid2.0 Fid3.0 H1. H2. H3. H4. H5. H6. J2.0 J2.6 J2.7 J2.8 J2.9 J3. J3.0 J3.A8 J3.B8 J4. J4.0 J4.A8 J4.B8 J5.0 J5.1 J5.3 J5.5 P1.13 P1.14 P1.15 P1.16 P1.17 P1.18 P4.14 P4.15 P4.16 P4.17 P4.18 P5.16 P5.17 P5.18 P6.3 P7.3 P8.3 P9.3 P10.3 P11.7 P11.8 P12.7 P12.8 P12.11 P12.13 P13.7 P13.8 P13.9 P16.2 P18.3 SW5.0 U2. U2.A1 U2.A21 U2.A31 U2.AD2 U2.AE31 U2.AG31 U2.AH2 U2.AJ1 U2.AK2 U2.AK4 U2.AK6 U2.AK8 U2.AK10 U2.AK12 U2.AK14 U2.AK22 U2.AK24 U2.AK26 U2.AK28 U2.AK30 U2.AL1 U2.AL31 U2.B10 U2.D2 U2.F2 U2.J1 U2.K2 U2.M2 U2.P2 U2.T2 U2.V2 U2.Y2 U3.9 U3.10 U3.11 U3.15 U3.18 U3.19 U3.25 U3.26 U3.27 U5.7 U5.12 U6.7 U6.12 U7.7 U7.12 U7.15

## Polygon pours and split planes (outlines as drawn)
GND on Top Side "Top_Layer-GND" (solid, remove dead copper, pour order 28): 0.02,-0.034 0.02,63.466 145,63.466 145,-0.034
NetC70_2 on Top Side "NETC111_2" (solid, pour order 7): 10,24.283 10,27.925 9.4,27.925 9.4,26.758 7.491,26.758 7.491,26.248 9.4,26.248 9.4,24.283
Shield on Top Side "SHIELD_L01_P003" (solid, remove dead copper, pour order 3): 0,44.6 7.913,44.6 7.913,18.238 0,18.238
NetQ3_1 on Top Side "NONET_L-01_P-001" (solid, pour order 23): 0.552,47.256 0.552,48.731 2.23,48.731 2.23,47.256 0.788,47.256
VBUS:nRF on Top Side "VBUS_nRF" (solid, pour order 26): 9.485,43.622 9.275,43.831 9.275,44.42 8.894,44.8 1.126,44.8 0.556,45.371 0.556,46.91 1.625,46.91 1.625,45.828 1.752,45.7 9.225,45.7 10,44.925 10,43.825 9.796,43.622 9.785,43.622
VBUS:DBGR on Top Side "VBUS:DBGR_L01_P011" (solid, pour order 11): 9.387,28.587 9.387,29.863 9.75,30.225 10.7,30.225 10.85,30.075 10.85,29.275 10.65,29.075 10.185,29.075 10.185,28.587
VBUS on Top Side "VBUS" (solid, pour order 0): 3.11,50.091 3.775,50.091 3.85,50.166 3.85,51.15 cw(c4,51.15) 4,51.3 6.5,51.3 cw(c6.5,51.14) 6.66,51.14 6.66,50.34 ccw(c6.909,50.34) 6.909,50.091 7.191,50.091 ccw(c7.191,50.3) 7.4,50.3 7.4,51.2 cw(c7.5,51.2) 7.5,51.3 9.3,51.3 cw(c9.3,51.1) 9.5,51.1 9.5,49.383 ccw(c10.71,49.383) 9.854,48.527 10.698,47.684 ccw(c11.14,48.126) 11.14,47.5 11.5,47.5 cw(c11.5,47.3) 11.7,47.3 11.7,46.289 ccw(c11.938,46.289) 11.938,46.05 13.409,46.05 ccw(c13.409,46.166) 13.525,46.166 13.525,46.506 ccw(c13.43,46.506) 13.43,46.6 12.4,46.6 cw(c12.4,46.735) 12.265,46.735 12.265,47.343 ccw(c11.637,47.343) 12.081,47.788 10.875,48.994 cw(c11.659,49.778) 10.55,49.778 10.55,51.85 ccw(c10.075,51.85) 10.075,52.325 3.903,52.325 ccw(c3.903,51.532) 3.11,51.532
NetC64_2 on Top Side "NETC111_2" (solid, pour order 6): 10,40.5 10,43.162 9.4,43.162 9.4,41.994 7.491,41.994 7.491,41.484 9.4,41.484 9.4,40.5
VBUS:DBGR on Top Side "VBUS_DBGR" (solid, pour order 21): 5.78,48.731 4.137,48.731 4,48.594 4,47.7 4.125,47.575 5.78,47.575 5.78,48.59
GND on Mid-Layer 6 "Mid_Layer6-GND" (solid, remove dead copper, pour order 27): -0.002,0.013 -0.002,63.512 145,63.512 145,0.013
VSYS on Mid-Layer 6 "VSYS_mid_6" (solid, pour order 17): 14.865,50.09 16.408,50.09 16.975,49.524 17.379,49.12 23.7,49.12 23.7,47.512 16.412,47.512 14.877,49.047
VBUS:DBGR on Mid-Layer 6 "VBUS_DBGR" (solid, pour order 24): 5.78,48.731 4.137,48.731 4,48.594 4,47.7 4.125,47.575 5.78,47.575 5.78,48.59
VBUS:DBGR on Mid-Layer 6 "VBUS:DBGR_L07_P025" (solid, pour order 25): 9.475,27.85 9.275,28.05 9.275,29.85 9.75,30.325 10.7,30.325 10.85,30.175 10.85,29.375 10.65,29.175 10.175,29.175 10,29 10,28.025 9.825,27.85
Shield on Bottom Side "SHIELD_L08_P004" (solid, remove dead copper, pour order 4): -0.002,45.341 7.913,45.341 7.913,18.238 0,18.238 0,18.229
GND on Bottom Side "Bottom_Layer-GND" (solid, remove dead copper, pour order 10): 0,0 0,63.5 145,63.5 145,0
GND on Mid-Layer 3 "Mid_Layer3-GND" (solid, remove dead copper, pour order 29): 0,0 0,63.5 145,63.5 145,0
VDD:DBGR on Mid-Layer 3 "NONET_L-01_P-001" (solid, pour order 14): 17.294,28.89 12.126,23.722 12.126,12.983 19.951,5.157 19.951,0.439 30.629,0.439 30.629,28.89
GND on Mid-Layer 4 "Mid_Layer4-GND" (solid, remove dead copper, pour order 12): 0,0 0,63.5 145,63.5 145,0
GND on Mid-Layer 5 "Mid_Layer5-GND" (solid, remove dead copper, pour order 16): 0,0 0,63.5 145,63.5 145,0
GND on Mid-Layer 2 "Mid_Layer2-GND" (solid, remove dead copper, pour order 15): 0,0 0,63.5 145,63.5 145,0
GND on Mid-Layer 1 "Mid_Layer1-GND" (solid, remove dead copper, pour order 13): 0,0 0,63.5 145,63.5 145,0

## Keep-outs
Top Side:
  region: 9.235,43.772 10.035,43.772 10.035,43.172 9.235,43.172
Mid-Layer 2:
  lines w0.6: 12.5,39.352 13.971,39.352 14.455,39.836 34.896,39.836 ; 34.767,39.836 ccw(c34.767,41.665) 36.06,40.372 37.644,41.955 cw(c39.44,40.159) 39.44,42.699 39.856,42.699 122.315,42.699 122.924,42.699 cw(c122.924,40.159) 124.72,41.955 125.693,40.982 cw(c123.586,38.874) 126.566,38.874 126.566,36.452 126.566,39.052
Mid-Layer 4:
  lines w0.6: 12.5,39.352 13.971,39.352 14.455,39.836 34.896,39.836 ccw(c34.896,42.104) 34.898,39.836 ; 34.767,39.836 ccw(c34.767,41.665) 36.06,40.372 37.644,41.955 cw(c39.44,40.159) 39.44,42.699 39.856,42.699 ; 39.856,42.701 122.249,42.701 ; 122.315,42.699 122.924,42.699 cw(c122.924,40.159) 124.72,41.955 125.693,40.982 cw(c123.586,38.874) 126.566,38.874 ; 126.566,36.452 126.566,39.052

## Other copper
Top Side:
  rectangle net GND: 6.915,20.418 8.85,21.234
  rectangle net GND: 6.915,27.034 8.85,27.85
  rectangle net GND: 1.356,30.375 4.068,31.625
  rectangle net GND: 1.356,31.9 4.075,33.128
  rectangle net GND: 6.915,35.654 8.85,36.47
  rectangle net GND: 6.915,42.27 8.85,43.087
  rectangle net GND: 125.92,33.594 126.47,34.15
  region net Shield: 3.71,29.979 1.71,29.979 1.71,28.009 3.71,28.009
  rectangle net Shield: 1.72,33.525 3.72,35.495
  rectangle net ANT: 142.889,14.783 144.159,18.945
  rectangle net NetR16_1: 11.375,51 12.55,52.9
  rectangle net NetR16_1: 10.75,51 13.022,52.15
  rectangle net VSYS: 13.675,48.325 14.65,51.9
  rectangle net VSYS: 13.222,51 14.65,52.15
  rectangle net P5V0: 11.375,53.3 14.65,54.45
  region net GND: 23.727,44.35 22.925,44.35 22.925,45.825 21.925,46.825 21.6,46.825 21.6,47.125 21.998,47.125 22.748,46.375 23.727,46.375
  region net GND: 21.4,48.85 22.04,48.85 22.74,49.55 23.727,49.55 23.727,51.366 22.923,51.366 22.923,50.272 21.805,49.118 21.4,49.118
  region net VOUT2: 22.927,53.01 cw(c22.965,53.01) 22.965,53.047 25.116,53.047 25.116,51.775 28.2,51.775 28.2,48.134 26.298,48.134 26.309,50.646 24.215,50.645 24.215,52.26 22.927,52.26
  region net VSYS: 21.475,48.125 21.475,47.825 21.905,47.825 cw(c21.905,47.315) 22.247,47.694 cw(c18.493,43.542) 22.916,46.972 23.727,46.972 23.727,48.922 22.916,48.922 cw(c20.351,50.765) 22.337,48.309 cw(c21.817,48.952) 21.817,48.125
  region net VDD:nRF_PMIC: 21.191,46.625 21.191,44.189 21.731,43.55 27.1,43.55 27.1,46.957 25.963,46.957 25.963,44.175 22.528,44.175 22.528,45.485 21.75,46.135 21.75,46.625
  pour cut-out: 9.237,28.391 9.237,28.091 10.337,28.091 10.337,28.391
  pour cut-out: 23.948,49.545 22.9,49.545 22.9,49.318 23.948,49.318
  pour cut-out: 23.948,49.508 23.948,51.695 23.721,51.695 23.721,49.508
  pour cut-out: 22.73,51.662 24,51.662 24,51.889 22.73,51.889
  pour cut-out: 22.7,52.21 22.7,50.022 22.927,50.022 22.927,52.21
  pour cut-out: 23.8,46.505 22.774,46.505 22.774,46.378 23.8,46.378
  pour cut-out: 23.853,44.937 23.853,46.416 23.726,46.416 23.726,44.937
  pour cut-out: 22.927,44.3 22.927,45.78 22.8,45.78 22.8,44.3
  pour cut-out: 22.905,45.845 21.925,46.825 21.824,46.725 22.805,45.744
  pour cut-out: 25.932,45.05 25.932,47.079 25.292,47.079 25.292,45.05
  pour cut-out: 22.849,46.476 22.099,47.226 21.998,47.125 22.748,46.375
  pour cut-out: 22.741,49.549 21.991,48.799 22.092,48.699 22.842,49.449
  pour cut-out: 22.763,50.237 22.013,49.487 22.09,49.411 22.84,50.161
  pour cut-out: 24.662,47.397 24.662,48.497 24.4,48.497 24.4,47.397
  pour cut-out: 26.314,47.397 26.314,48.497 26.052,48.497 26.052,47.397
  pour cut-out: 26.052,48.497 26.052,48.65 24.662,48.65 24.662,48.497
  pour cut-out: 26.052,47.244 26.052,47.397 24.662,47.397 24.662,47.244
  pour cut-out: 24.359,44.35 24.359,45.05 23.732,45.05 23.732,44.35
  region net NetC36_2: 13.9,48.125 13.9,47.2 13.9,46.05 14.725,46.05 14.725,46.925 15.625,47.825 16.625,47.825 16.625,48.125
  region net VSYS: 14.825,48.325 13.9,48.325 13.9,50.273 15.95,50.273 15.95,48.625 16.625,48.625 16.625,48.325
  pour cut-out: 27.325,23.63 27.325,23.43 27.258,23.43 27.258,23.63
Mid-Layer 1:
  pour cut-out: 139.662,34.602 139.662,32.814 132.354,32.814 132.354,34.602
Mid-Layer 2:
  pour cut-out: 139.662,34.602 139.662,32.814 132.354,32.814 132.354,34.602
  pour cut-out: 58.263,40.808 58.431,40.808 58.431,40.33 58.252,40.33
  pour cut-out: 98.233,26.196 98.233,24.726 98.032,24.726 98.032,26.196
Mid-Layer 3:
  pour cut-out: 139.662,34.602 139.662,32.814 132.354,32.814 132.354,34.602
Mid-Layer 4:
  pour cut-out: 139.662,34.602 139.662,32.814 132.354,32.814 132.354,34.602
Mid-Layer 5:
  pour cut-out: 139.662,34.602 139.662,32.814 132.354,32.814 132.354,34.602
Mid-Layer 6:
  pour cut-out: 139.662,34.602 139.662,32.814 132.354,32.814 132.354,34.602
Multi-Layer:
  pour cut-out: 137.18,0.126 145.031,0.126 144.989,50.335 137.185,50.335

## Silkscreen, mask and mechanical layers (free items; w line width, h text height)
Top Overlay:
  drawing of 61 lines, arcs and shapes, not listed
  text "OFF" at 2.222,60.114 h1.5 r90
  text "NFC" at 133.182,58.531 h1.78
  text "VBUS" at 17.477,56.103 h1
  text "GND" at 20.077,56.096 h1
  text "5V0" at 22.601,56.097 h1
  text "GND" at 35.44,55.675 h1.52
  text "GND" at 42.564,55.028 h1.52
  text "01" at 53.639,55.028 h1.52
  text "03" at 55.999,55.028 h1.52
  text "05" at 58.538,55.028 h1.52
  text "07" at 61.115,55.028 h1.52
  text "09" at 63.616,55.028 h1.52
  text "VDD IO" at 73.175,55.028 h1.52
  text "GND" at 81.299,55.028 h1.52
  text "01" at 92.374,55.028 h1.52
  text "03" at 94.734,55.028 h1.52
  text "05" at 97.273,55.028 h1.52
  text "07" at 99.85,55.028 h1.52
  text "09" at 102.351,55.028 h1.52
  text "VDD IO" at 112.129,55.028 h1.27
  text "GND" at 50.221,55.009 h1.52
  text "GND" at 88.956,55.009 h1.52
  text "VDD nRF / CURRENT / MEASURE" at 30.392,54.644 h1.8 r90
  text "PMIC" at 13.539,53.879 h1.8
  text "POWER" at 8.654,53.322 h1.8 r90
  text "ON" at 2.221,53.155 h1.5 r90
  text "DEBUG IN / TRACE" at 119.422,52.3 h1.78
  text "LED0" at 117.085,48.761 h1.78
  text "LED1" at 123.435,48.761 h1.78
  text "PORT0" at 49.95,48.135 h1.78 r90
  text "PORT2" at 88.704,48.135 h1.78 r90
  text "00" at 53.427,45.647 h1.52
  text "02" at 56.017,45.647 h1.52
  text "04" at 58.521,45.647 h1.52
  text "06" at 61.066,45.647 h1.52
  text "08" at 63.611,45.647 h1.52
  text "GND" at 73.085,45.634 h1.52
  text "00" at 92.162,45.647 h1.52
  text "02" at 94.752,45.647 h1.52
  text "04" at 97.256,45.647 h1.52
  text "06" at 99.801,45.647 h1.52
  text "08" at 102.346,45.647 h1.52
  text "10" at 105.053,45.647 h1.52
  text "GND" at 111.82,45.634 h1.52
  text "5V0" at 41.602,45.624 h1.52
  text "5V0" at 80.337,45.624 h1.52
  text "LED2" at 117.085,45.136 h1.78
  text "LED3" at 123.435,45.136 h1.78
  text "VDD IO" at 50.315,44.512 h1.52
  text "VDD IO" at 89.05,44.512 h1.52
  text "GND" at 42.564,42.328 h1.52
  text "01" at 53.639,42.328 h1.52
  text "03" at 55.999,42.328 h1.52
  text "05" at 58.538,42.328 h1.52
  text "07" at 61.115,42.328 h1.52
  text "09" at 63.616,42.328 h1.52
  text "13" at 68.843,42.328 h1.52
  text "GND" at 81.299,42.328 h1.52
  text "01" at 92.374,42.328 h1.52
  text "03" at 94.734,42.328 h1.52
  text "05" at 97.273,42.328 h1.52
  text "07" at 99.85,42.328 h1.52
  text "09" at 102.351,42.328 h1.52
  text "GND" at 50.221,42.309 h1.52
  text "11" at 66.318,42.319 h1.52
  text "15" at 71.343,42.319 h1.52
  text "VDD IO" at 73.175,42.319 h1.52
  text "GND" at 88.956,42.309 h1.52
  text "11" at 105.053,42.319 h1.52
  text "VDD IO" at 111.91,42.319 h1.52
  text "00-15" at 49.95,35.435 h1.78 r90
  text "PORT3" at 88.704,35.435 h1.78 r90
  text "12" at 68.858,32.956 h1.52
  text "14" at 71.558,32.967 h1.52
  text "12" at 107.593,32.956 h1.52
  text "00" at 53.427,32.947 h1.52
  text "02" at 56.017,32.947 h1.52
  text "04" at 58.521,32.947 h1.52
  text "06" at 61.066,32.947 h1.52
  text "08" at 63.611,32.947 h1.52
  text "10" at 66.318,32.947 h1.52
  text "GND" at 73.085,32.934 h1.52
  text "00" at 92.162,32.947 h1.52
  text "02" at 94.752,32.947 h1.52
  text "04" at 97.256,32.947 h1.52
  text "06" at 99.801,32.947 h1.52
  text "08" at 102.346,32.947 h1.52
  text "10" at 105.053,32.947 h1.52
  text "GND" at 111.82,32.934 h1.52
  text "5V0" at 41.602,32.924 h1.52
  text "5V0" at 80.337,32.924 h1.52
  text "nRF54LM20 USB" at 4.05,32.05 h1.8
  text "VDD / IO" at 50.317,31.815 h1.52
  text "VDD IO" at 89.05,31.812 h1.52
  text "DEBUGGER USB" at 4.05,29.804 h1.8
  text "GND" at 42.564,29.628 h1.52
  text "23" at 61.115,29.628 h1.52
  text "25" at 63.616,29.628 h1.52
  text "27" at 66.246,29.639 h1.52
  text "29" at 68.705,29.639 h1.52
  text "31" at 71.205,29.629 h1.52
  text "VDD IO" at 73.175,29.629 h1.52
  text "GND" at 50.221,29.609 h1.52
  text "17" at 53.639,29.619 h1.52
  text "19" at 56.139,29.619 h1.52
  text "21" at 58.679,29.619 h1.52
  text "PORT1" at 49.949,28.016 h1.78 r90
  text "nRF54LM20" at 125.836,25.915 h1.78
  text "16-31" at 49.95,22.735 h1.78 r90
  text "GND" at 114.761,22.553 h1.4
  text "16" at 53.519,20.254 h1.52
  text "22" at 61.066,20.256 h1.52
  text "24" at 63.611,20.256 h1.52
  text "18" at 56.019,20.247 h1.52
  text "20" at 58.4,20.247 h1.52
  text "26" at 66.196,20.247 h1.52
  text "28" at 68.741,20.247 h1.52
  text "30" at 71.204,20.247 h1.52
  text "GND" at 73.085,20.234 h1.52
  text "5V0" at 41.602,20.224 h1.52
  text "BUTTON 0" at 113.323,19.18 h1.78
  text "BUTTON 1" at 123.584,19.18 h1.78
  text "VDD IO" at 50.315,19.118 h1.52
  text "GND" at 42.563,16.954 h1.52
  text "D1" at 61.078,16.928 h1.52
  text "E1" at 63.655,16.928 h1.52
  text "GND" at 50.221,16.909 h1.52
  text "B0" at 53.432,16.912 h1.52
  text "C1" at 56.127,16.912 h1.52
  text "C3" at 58.488,16.912 h1.52
  text "D3" at 66.128,16.921 h1.52
  text "F1" at 68.858,16.919 h1.52
  text "G0" at 71.092,16.912 h1.52
  text "VDD IO" at 73.175,16.919 h1.52
  text "H1" at 76.442,16.898 h1.52
  text "H3" at 78.804,16.901 h1.52
  text "H5" at 81.336,16.892 h1.52
  text "RESET" at 2.01,14.968 h1.78
  text "DEBUGGER" at 17.963,12.045 h1.8
  text "EXP" at 49.95,10.087 h1.27 r90
  text "BUTTON 2" at 113.323,9.681 h1.78
  text "BUTTON 3" at 123.584,9.681 h1.78
  text "A0" at 53.342,7.54 h1.52
  text "C0" at 55.912,7.531 h1.52
  text "C2" at 58.501,7.531 h1.52
  text "D0" at 61.012,7.54 h1.52
  text "E2" at 63.611,7.531 h1.52
  text "D2" at 66.141,7.547 h1.52
  text "F0" at 68.746,7.55 h1.52
  text "C4" at 71.166,7.55 h1.52
  text "GND" at 73.085,7.534 h1.52
  text "H2" at 78.817,7.536 h1.52
  text "H4" at 81.321,7.546 h1.52
  text "5V0" at 41.602,7.524 h1.52
  text "H0" at 76.228,7.52 h1.52
  text "GND" at 34.771,7.252 h1.4
  text "DEBUG OUT" at 11.327,7.175 h1.78
  text "nRF54LM20-DK" at 86.113,7.113 h3
  text "VDD IO" at 50.315,6.412 h1.52
  text ".PCBNumber" at 97.818,2.307 h2.03
  text "GND" at 34.771,1.987 h1.4
  text ".PCBRevision" at 97.823,0.965 h1.52